# Altium PCB microphone_adapter_1-1.PcbDoc
Units mm, origin at the board's own origin, x right, y up, seen from the top; angles counter-clockwise.
Board outline 60 x 33 mm, 4 copper layers (Top Layer, Inner 1, Inner 2, Bottom Layer), stack 1.53 mm thick; 13 components, 12 nets, 62 pads, 261 vias.
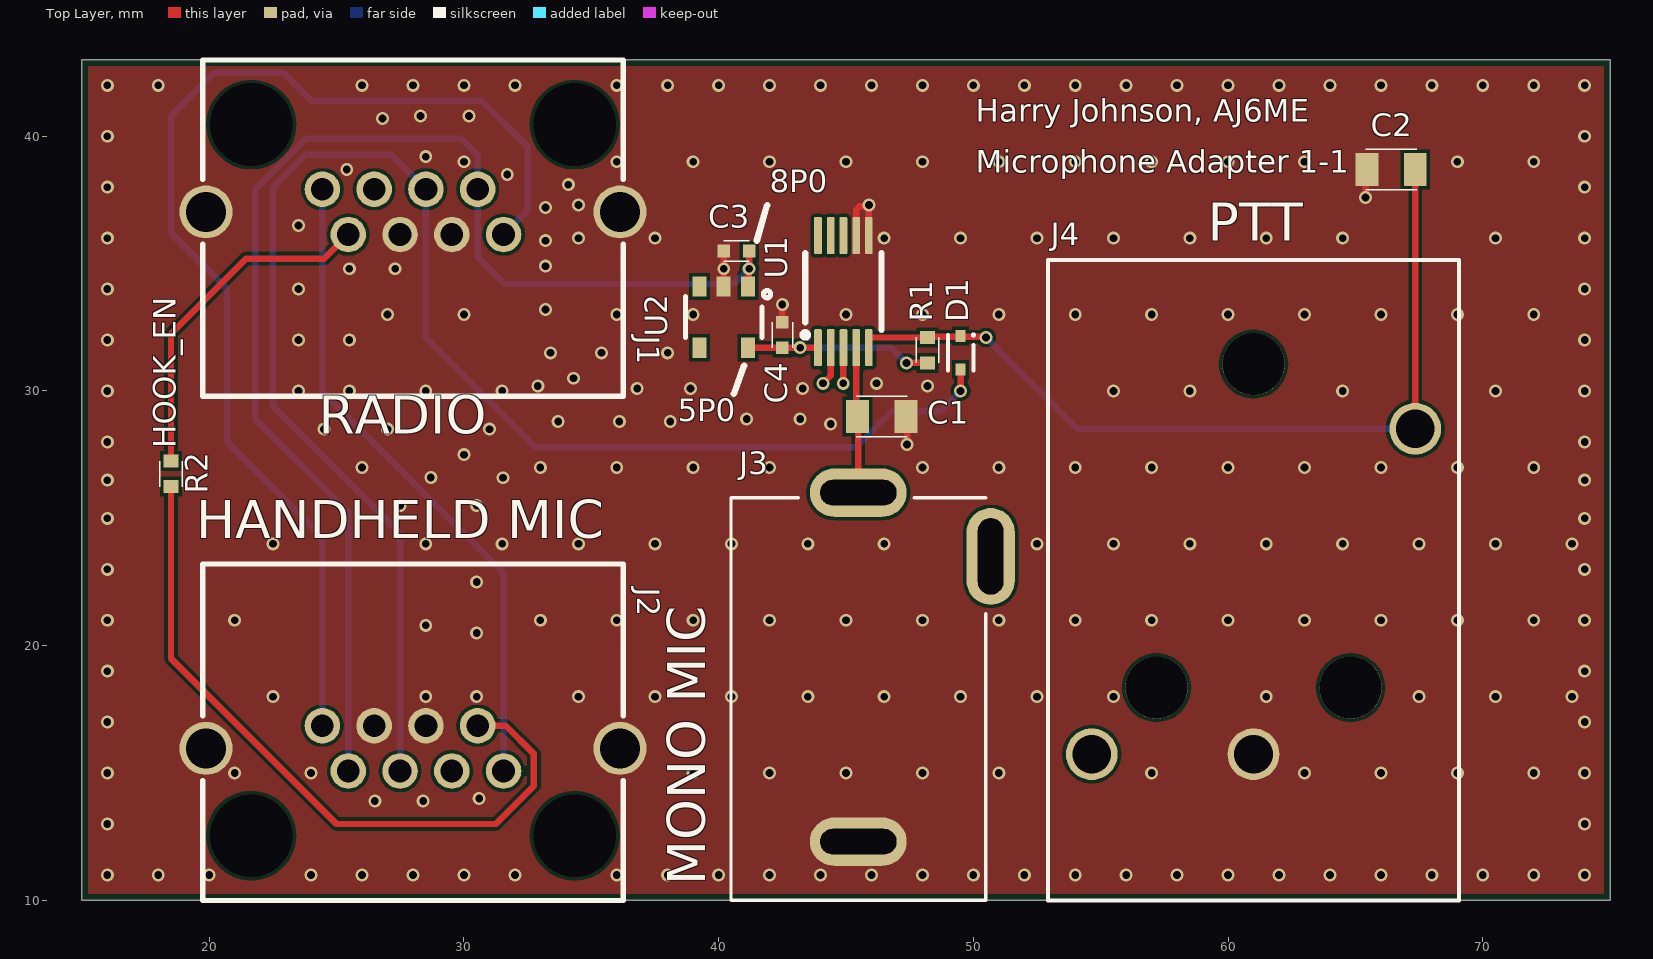
[diagram p0: Top Layer view]
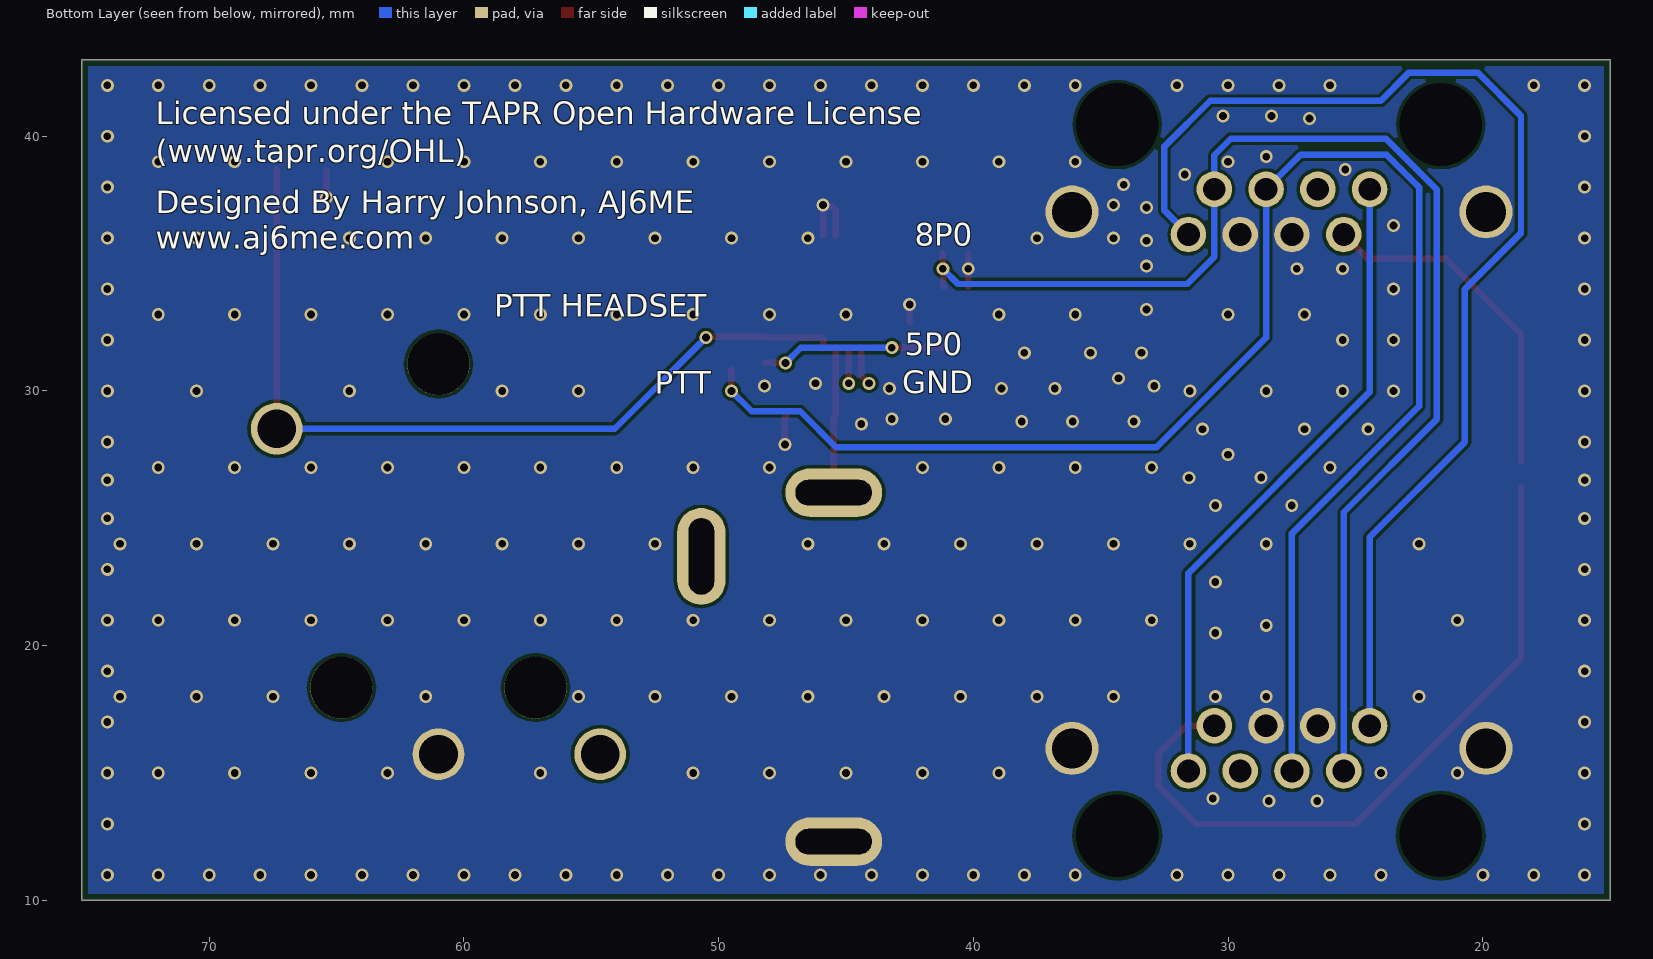
[diagram p1: Bottom Layer view, seen from below]
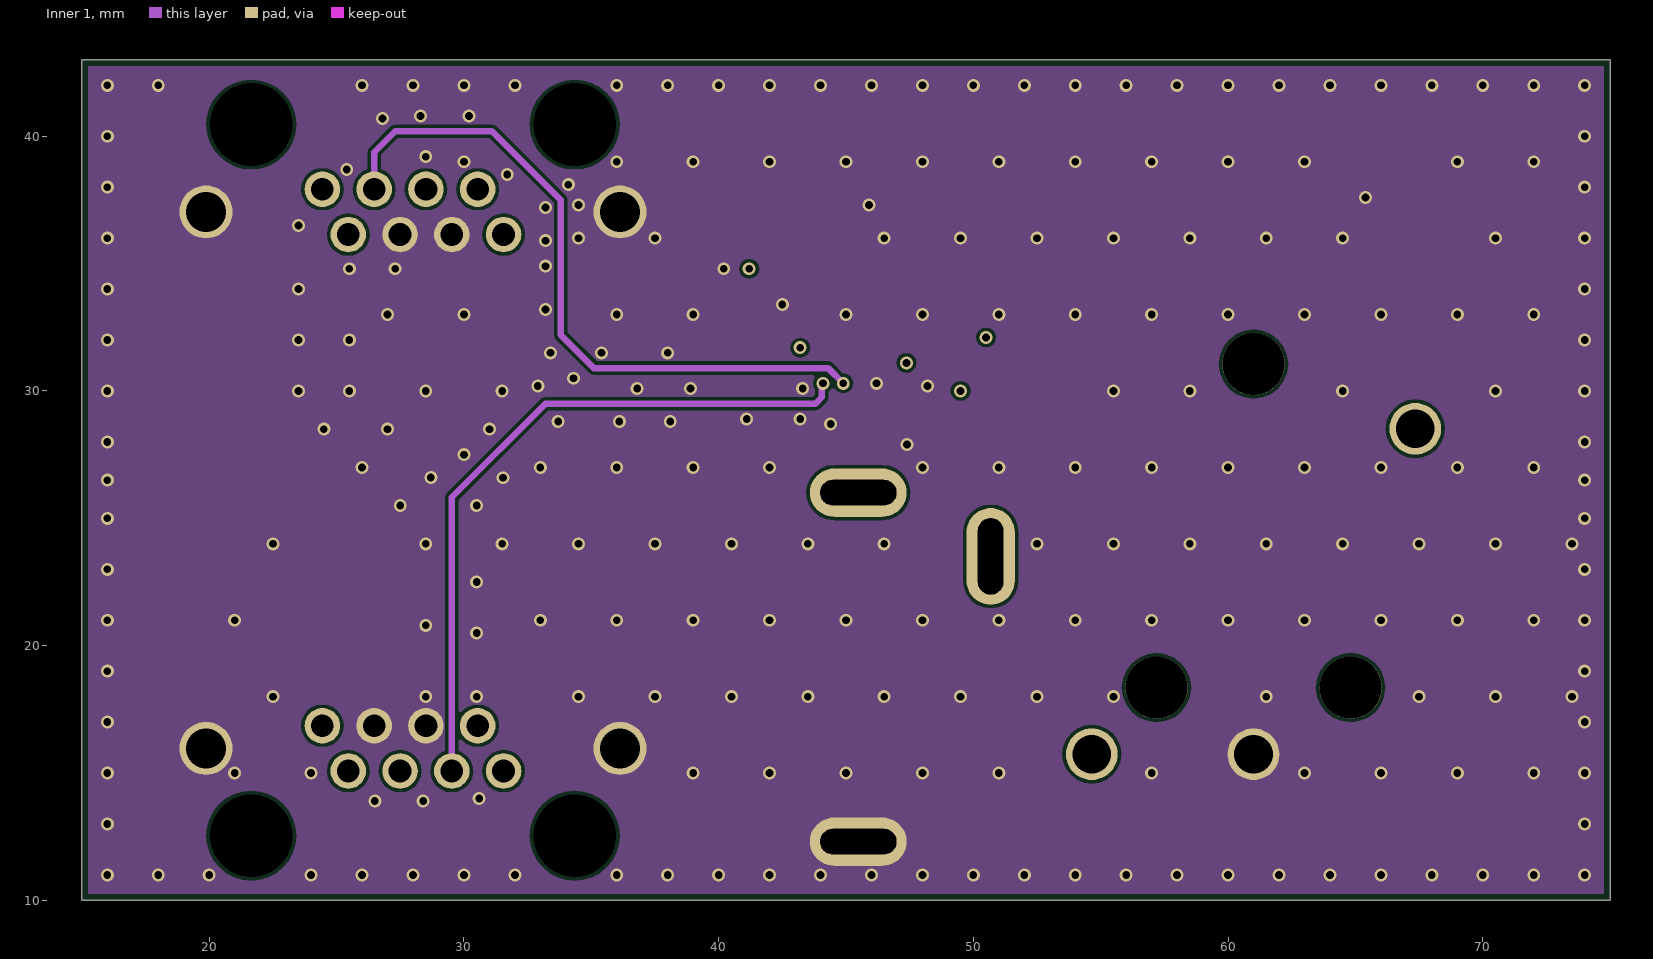
[diagram p2: Inner 1]
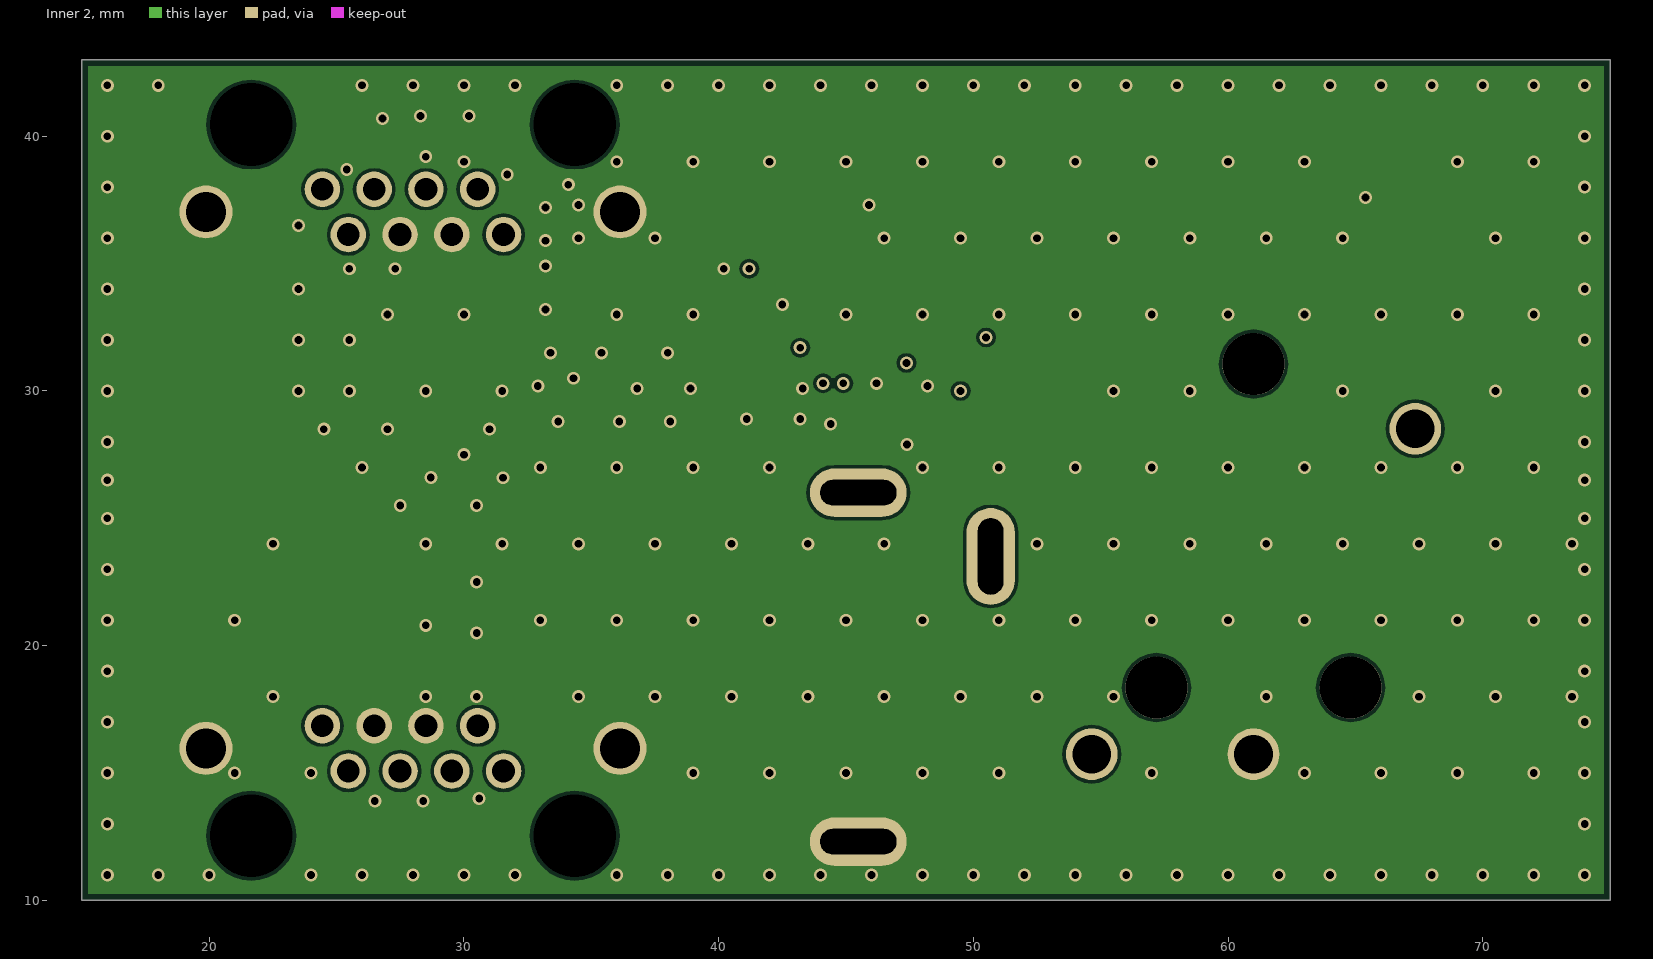
[diagram p3: Inner 2]
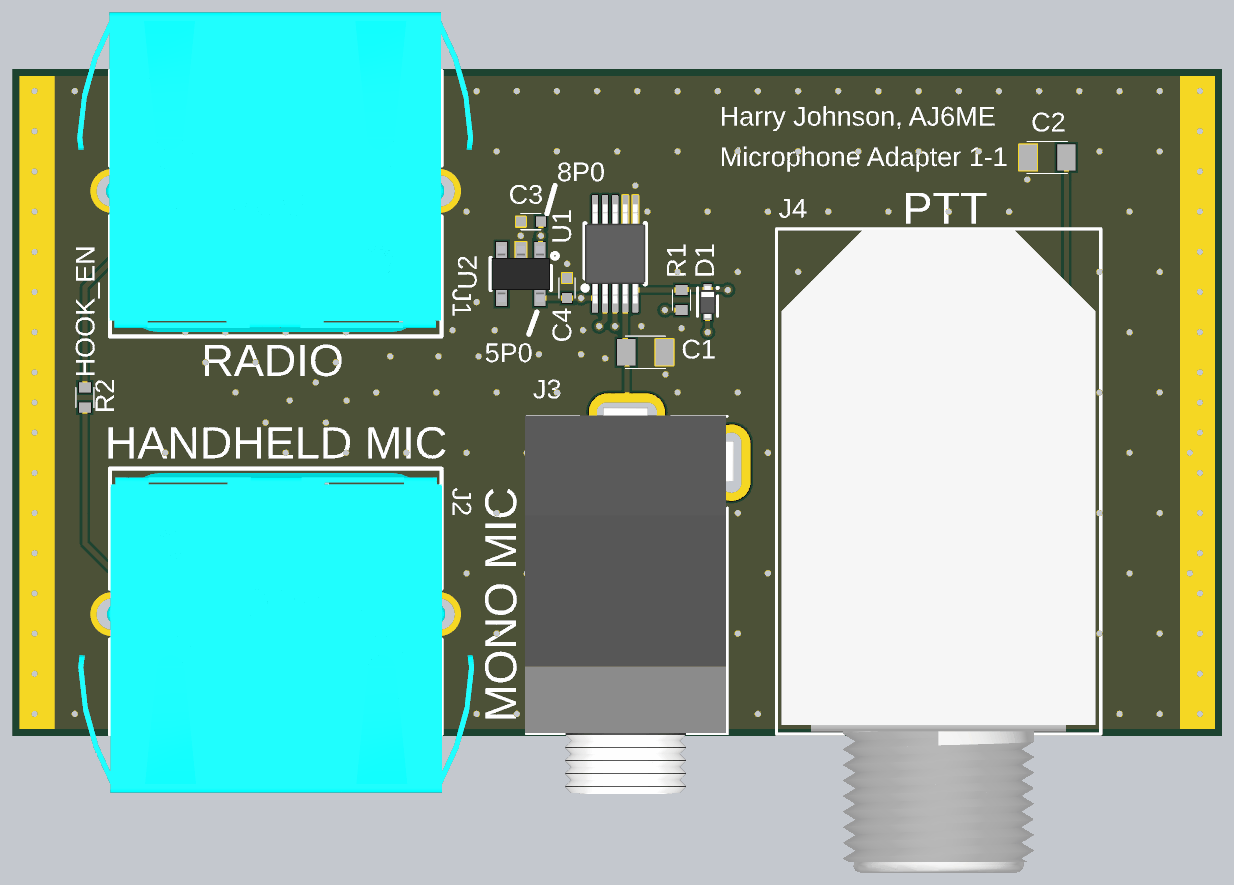
[diagram p4: 3D render of the assembled board from above, using the file's embedded part models]

## Layer stack, top to bottom
Top Solder: solder mask 0.0102, Solder Resist, Dk 3.5
Top Layer: signal copper 0.035
Dielectric 2: prepreg 0.23, PP-006, Dk 4.1
Inner 1: signal copper 0.035
Dielectric 1: core 0.93, MF-Core, Dk 3.9
Inner 2: signal copper 0.035
Dielectric 3: prepreg 0.23, PP-006, Dk 4.1
Bottom Layer: signal copper 0.035
Bottom Solder: solder mask 0.0102, Solder Resist, Dk 3.5

## Board outline
15,10 75,10 75,43 15,43

## Design rules (kind name [scope] priority, off if disabled: settings)
BoardOutlineClearance [not (OnLayer('Top Overlay') or OnLayer('Bottom Overlay'))] p1: gap=0.254 ignorepadtopadclearanceinfootprint=FALSE
Clearance [All] p1: gap=0.127 ignorepadtopadclearanceinfootprint=FALSE
HoleSize [All] p1: absolutevalues=TRUE maxlimit=6.35 minlimit=0.025 maxpercent=80.000 minpercent=20.000
MinimumAnnularRing [All] p1: minimumring=0.102
MinimumSolderMaskSliver [All] p1: minsoldermaskwidth=0.076
PlaneClearance [All] p1: clearance=0.127
PlaneConnect [All] p1: planeconnectstyle=Direct reliefexpansion=0.508 reliefentries=4 reliefconductorwidth=0.254 reliefairgap=0.254
PolygonConnect [All] p1: connectstyle=Direct reliefconductorwidth=0.254 reliefentries=4 polygonreliefangle="90 Angle" airgapwidth=0.254
RoutingVias [All] p1: holewidth=0.254 width=0.457 viastyle="Through Hole" minholewidth=0.254 minwidth=0.457 maxholewidth=5 maxwidth=6
SilkToSilkClearance [All] p1: silktosilkclearance=0.127
SilkToSolderMaskClearance [IsPad] p1: minsilkscreentomaskgap=0 clearancetoexposedcopper=TRUE
SolderMaskExpansion [All] p1: expansion=0.051 istentingtop=FALSE
Width [All] p1: maxlimit=5.08 minlimit=0.127 preferedwidth=0.254
24 further rules are at their usual default settings.

## Components (designator, comment, footprint, x,y, rotation, side; value= is the part's Value field where it differs from the comment)
C1 "GRM21A5C2D470JW01D" C0805_1.30MM 46.4,29 r180 top
C2 "GRM21A5C2D470JW01D" C0805_1.30MM 66.4,38.7 r180 top
C3 "GRM155C81E105ME11D" C0402_0.55MM 40.7,35.5 r180 top
C4 "GRM155C81E105ME11D" C0402_0.55MM 42.5,32.2 r90 top
D1 "BAT54XV2T1G" SOD523_ONSEMI 49.5,31.5 r270 top
J1 "RJHSE-5480" ETH_RJ45_RA_RJHSE-5480 28,43 r180 top
J2 "RJHSE-5480" ETH_RJ45_RA_RJHSE-5480 28,10 r0 top
J3 "MJ-3536" AUD_CUI_MJ-3536 45.482,17.907 r90 top
J4 "RN112BPC" AUD_SWITCHCRAFT_RN112BPC 61,10 r180 top
R1 "RC0402FR-074K7L" R0402_0.40MM 48.2,31.6 r90 top value=4.7k
R2 "RC0402JR-070RL" R0402_0.40MM 18.5,26.75 r90 top value=0
U1 "TS5A22364DGSR" TI_VSSOP_10_DGS0010A 44.9,33.9 r90 top
U2 "AP7370-50W5-7" DIODES_INC_SOT25_5 40.2,32.9 r0 top

## Footprints (in the part's own frame and the unit in brackets; to place one, negate y for a bottom-side part, rotate by r counter-clockwise, add the part's x,y. Pads: shape width x height; smd on the part's side, far side on the other; paste and mask are expansions set on the pad)
AUD_CUI_MJ-3536 [mm] "CUI 3.5mm mono right-angle jack"
  oval 1.9x3.8 hole 1 slot 3 at 90 deg: 1(-5.6,0) 2(8.1,0)
  oval 3.8x1.9 hole 1 slot 3 at 0 deg: 3(5.6,-5.2)
  silkscreen extent -7.9,-5 7.9,5, body extent -10.89,-5.33 8.35,5.07, height 10.29
AUD_SWITCHCRAFT_RN112BPC [mil] "Switchraft RN112BPC"
  round 80 hole 60: 1(0,-226) 3(-250,-729) 5(250,-226)
  round 96 hole 96: 6(-150,-329) 7(150,-329) 8(0,-829)
  silkscreen extent -318,-990 318,0, body extent -307,-989 308,271, height 688
C0402_0.55MM [mm]
  rect 0.5x0.5 smd: 1(-0.5,0) 2(0.5,0)
  silkscreen extent -0.5,-0.4 0.5,0.4, body extent -0.5,-0.25 0.5,0.25, height 0.55
C0805_1.30MM [mm]
  rect 0.9x1.3 smd: 1(-0.95,0) 2(0.95,0)
  silkscreen extent -1,-0.8 1,0.8, body extent -1,-0.63 1,0.63, height 1.3
DIODES_INC_SOT25_5 [mm] "Diodes Inc SOT25 package."
  rect 0.55x0.8 smd: 1(0.95,1.2) 2(0,1.2) 3(-0.95,1.2) 4(-0.95,-1.2) 5(0.95,-1.2)
  silkscreen extent -1.5,-0.8 1.84,1.04, body extent -1.45,-1.4 1.45,1.4, height 1.2
ETH_RJ45_RA_RJHSE-5480 [mil] "Amphenol ICC RJHSE-5480 right-angle RJ45, shielded, no LEDs."
  round 55 hole 35: 1(140,200) 2(100,270) 3(60,200) 4(20,270) 5(-20,200) 6(-60,270) 7(-100,200) 8(-140,270)
  oval 0x127.99 hole 128 paste-393.7 mask-393.7: MH(-250,100) MH(250,100)
  round 82 hole 62: SHLD(-320,235) SHLD(320,235)
  silkscreen extent -325,0 325,520, body extent -387,-115 389,511, height 596
R0402_0.40MM [mm]
  rect 0.5x0.6 smd: 1(-0.5,0) 2(0.5,0)
  silkscreen extent -0.5,-0.45 0.5,0.45, body extent -0.5,-0.25 0.5,0.25, height 0.4
SOD523_ONSEMI [mm] "On Semi SOD523 Diode"
  rect 0.48x0.4 smd: 1(-0.66,0) 2(0.66,0)
  silkscreen extent -0.75,-0.5 0.7,0.55, body extent -0.8,-0.4 0.8,0.4, height 0.7
TI_VSSOP_10_DGS0010A [mm] "TI 10-pin VSSOP"
  rrect25% 1.45x0.3 smd mask+0.05: 1(-2.2,1) 2(-2.2,0.5) 3(-2.2,0) 4(-2.2,-0.5) 5(-2.2,-1) 6(2.2,-1) 7(2.2,-0.5) 8(2.2,0) 9(2.2,0.5) 10(2.2,1)
  silkscreen extent -1.8,-1.49 1.51,1.6, body extent -2.46,-1.5 2.46,1.5, height 1.06

## Part data
C1 C2: library part capacitor_standard_864, "CAP CER 47PF 200V C0G/NP0 0805", Capacitance=47pF, Digi-Key Part Number=490-14653-1-ND, Manufacturer="Murata Electronics", Operating Temperature="-55°C ~ 125°C", Package / Case="0805 (2012 Metric)", Temperature Coefficient="C0G, NP0", Tolerance=±5%, Voltage - Rated=200V, Applications="General Purpose", ComponentLink1Description=Datasheet, ComponentLink1URL=https://search.murata.co.jp/Ceramy/image/img/A01X/G101/ENG/GRM21A5C2D470JW01-01.pdf, Key=capacitor_standard_864, Manufacturer Part Number=GRM21A5C2D470JW01D, Mounting Type="Surface Mount, MLCC", Part Status=Active, Series=GRM, Size / Dimension="0.079\" L x 0.049\" W (2.00mm x 1.25mm)", Thickness (Max)="0.051\" (1.30mm)", Unit Price (USD)=0.31
C3 C4: library part capacitor_standard_537, "CAP CER 1UF 25V X6S 0402", Capacitance=1µF, Digi-Key Part Number=490-10015-1-ND, Manufacturer="Murata Electronics", Operating Temperature="-55°C ~ 105°C", Package / Case="0402 (1005 Metric)", Temperature Coefficient=X6S, Tolerance=±20%, Voltage - Rated=25V, Applications="General Purpose", ComponentLink1Description=Datasheet, ComponentLink1URL=https://search.murata.co.jp/Ceramy/image/img/A01X/G101/ENG/GRM155C81E105ME11-01.pdf, Key=capacitor_standard_537, Manufacturer Part Number=GRM155C81E105ME11D, Mounting Type="Surface Mount, MLCC", Part Status=Active, Series=GRM, Size / Dimension="0.039\" L x 0.020\" W (1.00mm x 0.50mm)", Thickness (Max)="0.022\" (0.55mm)", Unit Price (USD)=0.26
D1: library part DIODE_SCHOTTKY_30V_100MA_BAT54XV2T1G, "ON Semi BAT54XV2T1G; SMT Schottky Diode; 30V 200mA; 5ns; 2-Pin SOD-523", Average Rectified Current=200mA, Capacitance=10pF, Case/Package=SOD-523-2, Forward Voltage=800mV, Manufacturer="ON Semiconductor", Max Forward Surge Current (Ifsm)=600mA, Max Operating Temperature=125°C, Max Repetitive Reverse Voltage (Vrrm)=30V, Max Reverse Leakage Current=2uA, Min Operating Temperature=-55°C, Package Quantity=3000, Power Dissipation=200mW, Supplier Part Number 1=BAT54XV2T1GOSCT-ND, Category="Rectifier Diodes", ComponentLink1Description=https://datasheet.ciiva.com/16978/0900766b80dac45a-16978093.pdf?src-supplier=Allied+Electronics, ComponentLink1URL=https://datasheet.ciiva.com/16978/0900766b80dac45a-16978093.pdf?src-supplier=Allied+Electronics, ComponentLink2Description=https://datasheet.ciiva.com/25954/bat54xv2t1-d-25954496.pdf?src-supplier=Avnet+Europe, ComponentLink2URL=https://datasheet.ciiva.com/25954/bat54xv2t1-d-25954496.pdf?src-supplier=Avnet+Europe, ComponentLink3Description=https://datasheet.ciiva.com/915/bat54xv2t1-d-915462.pdf?src-supplier=Digi-Key, ComponentLink3URL=https://datasheet.ciiva.com/915/bat54xv2t1-d-915462.pdf?src-supplier=Digi-Key, ComponentLink4Description=https://datasheet.ciiva.com/8299/bat54xv2t1-d-8299994.pdf?src-supplier=Avnet, ComponentLink4URL=https://datasheet.ciiva.com/8299/bat54xv2t1-d-8299994.pdf?src-supplier=Avnet, ComponentLink5Description=https://datasheet.ciiva.com/16475/bat54xv2t1-d-16475627.pdf?src-supplier=Avnet+Asia, ComponentLink5URL=https://datasheet.ciiva.com/16475/bat54xv2t1-d-16475627.pdf?src-supplier=Avnet+Asia, ComponentLink6Description=https://datasheet.ciiva.com/8299/bat54xv2t1-d-8299996.pdf?src-supplier=Avnet, ComponentLink6URL=https://datasheet.ciiva.com/8299/bat54xv2t1-d-8299996.pdf?src-supplier=Avnet, ComponentLink7Description=https://datasheet.ciiva.com/22659/1708236-22659020.pdf?src-supplier=Element14, ComponentLink7URL=https://datasheet.ciiva.com/22659/1708236-22659020.pdf?src-supplier=Element14, ComponentLink8Description=https://datasheet.ciiva.com/915/bat54xv2t1-d-915463.pdf?src-supplier=Digi-Key, ComponentLink8URL=https://datasheet.ciiva.com/915/bat54xv2t1-d-915463.pdf?src-supplier=Digi-Key, ComponentLink9Description=https://datasheet.ciiva.com/8053/bat54xv2t1-d-8053674.pdf?src-supplier=Element14, ComponentLink9URL=https://datasheet.ciiva.com/8053/bat54xv2t1-d-8053674.pdf?src-supplier=Element14, ComponentLink10Description=https://datasheet.ciiva.com/16381/bat54xv2t1-d-16381647.pdf?src-supplier=Future+Electronics, ComponentLink10URL=https://datasheet.ciiva.com/16381/bat54xv2t1-d-16381647.pdf?src-supplier=Future+Electronics, Contact Plating=Tin,Matte, Current Rating=200mA, Element Configuration=Single, Forward Current=200mA, Halogen Free="Halogen Free", Height=0.6mm, Lead Free="Lead Free", Length=1.2mm, Manufacturer Part Number=BAT54XV2T1G, Max Reverse Voltage (DC)=30V, Max Surge Current=600mA, Number of Pins=2, Output Current=200mA, Packaging="Tape and Reel", Peak Non-Repetitive Surge Current=600mA, Peak Reverse Current=2uA, Polarity=Standard, Pricing 1="1=0.22000, 10=0.17800, 25=0.14960, 100=0.07300, 250=0.07188, 500=0.06092, 1000=0.04233 (USD)", Radiation Hardening=No, REACH SVHC="No SVHC", Recovery Time=5ns, Reverse Recovery Time=5ns, RoHS=Yes, Stock 1=229062, Supplier 1=Digi-Key, Voltage Rating (DC)=30V, Width=0.8mm
J1 J2: library part CONN_ETH_RJ45_RA_SHLD_RJHSE-5480_ALT, "Conn RJ-45 F 8 POS 2.03mm Solder RA Thru-Hole 8 Terminal 1 Port Tray Cat 5", Color=Black, Contact Resistance=20mR, Current Rating=1.5A, Flammability Rating="UL94 V-0", Insulation Resistance=500MR, Manufacturer=Amphenol, Max Operating Temperature=85°C, Max Voltage Rating (AC)=125V, Min Operating Temperature=-55°C, Package Quantity=120, Supplier Part Number 1=RJHSE-5480-ND, Category="Modular / Ethernet Connectors", ComponentLink1Description=https://datasheet.ciiva.com/685/rjhse548x-685638.pdf?src-supplier=Digi-Key, ComponentLink1URL=https://datasheet.ciiva.com/685/rjhse548x-685638.pdf?src-supplier=Digi-Key, ComponentLink2Description=https://datasheet.ciiva.com/15171/getdatasheetpartid-473858-15171069.pdf?src-supplier=Verical, ComponentLink2URL=https://datasheet.ciiva.com/15171/getdatasheetpartid-473858-15171069.pdf?src-supplier=Verical, ComponentLink3Description=https://datasheet.ciiva.com/3139/rjhse548x-3139205.pdf?src-supplier=Avnet, ComponentLink3URL=https://datasheet.ciiva.com/3139/rjhse548x-3139205.pdf?src-supplier=Avnet, ComponentLink4Description=https://datasheet.ciiva.com/7995/rjhse548x-7995031.pdf?src-supplier=Element14, ComponentLink4URL=https://datasheet.ciiva.com/7995/rjhse548x-7995031.pdf?src-supplier=Element14, ComponentLink5Description=https://datasheet.ciiva.com/16649/rjhse548x-16649863.pdf?src-supplier=Avnet+Europe, ComponentLink5URL=https://datasheet.ciiva.com/16649/rjhse548x-16649863.pdf?src-supplier=Avnet+Europe, Connector Type=Jack,RJ45, Contact Material=Bronze, Contact Plating=Gold, Depth=15.75mm, Direction=Up, Gender=Female, Housing Material=Thermoplastic, Lead Free="Lead Free", Length=16.51mm, Manufacturer Part Number=RJHSE-5480, Max Current Rating=1.5A, Mount="Through Hole", Number of Contacts=8, Number of Ports=1, Number of Positions=8, Number of Positions Loaded=8, Number of Rows=1, Orientation="Right Angle", Packaging=Tray, Pitch=2.03mm, Pricing 1="1=1.28000, 10=1.12500, 25=1.05840, 50=1.01440, 100=0.97020, 250=0.88200, 500=0.79380, 1000=0.70560, 2500=0.63945 (USD)", Radiation Hardening=No, REACH SVHC=Unknown, RoHS=Yes, Shielding=Shielded, Stock 1=1529, Supplier 1=Digi-Key, Termination=Solder, Voltage Rating=125V
J3: library part CONN_AUD_3.5_MM_MONO_MJ-3536, "CONN JACK MONO 3.5MM R/A", Color=Black, Current Rating=1A, Manufacturer=CUI, Supplier Part Number 1=CP-3536-ND, Body Material=Brass, Category="Audio / Video Cables", ComponentLink1Description=http://www.cui.com/product/resource/digikeypdf/mj-3536.pdf?src-supplier=Digi-Key, ComponentLink1URL=http://www.cui.com/product/resource/digikeypdf/mj-3536.pdf?src-supplier=Digi-Key, Connector Type=Jack, Contact Plating=Tin, Diameter=3.5mm, Gender=Female, Lead Free="Lead Free", Manufacturer Part Number=MJ-3536, Mount="Through Hole,Panel", Number of Conductors=2, Number of Ports=1, Orientation=Horizontal, Packaging=Bulk, Pricing 1="1=1.24000, 10=1.09400, 25=1.02960, 50=0.98680, 100=0.94380, 250=0.85800, 500=0.77220, 1000=0.68640, 2500=0.62205 (USD)", RoHS=Yes, Shielding=Unshielded, Stock 1=3239, Supplier 1=Digi-Key, Termination=Solder
J4: library part CONN_AUD_250_MIL_RN112BPC, "CONN JACK STEREO 0.25\" (6.35MM) R/A", Color=Black, Manufacturer=Switchcraft, Package Quantity=100, Supplier Part Number 1=SC1123-ND, Body Material=Plastic, Category=Connectors, ComponentLink1Description=https://datasheet.ciiva.com/15181/getdatasheetpartid-111564-15181163.pdf?src-supplier=Verical, ComponentLink1URL=https://datasheet.ciiva.com/15181/getdatasheetpartid-111564-15181163.pdf?src-supplier=Verical, ComponentLink2Description=https://datasheet.ciiva.com/19462/1774930-19462671.pdf?src-supplier=Jameco, ComponentLink2URL=https://datasheet.ciiva.com/19462/1774930-19462671.pdf?src-supplier=Jameco, Contact Material="Copper Alloy", Contact Plating=Silver, Depth=32.51mm, Diameter=6.35mm, Gender=Female, Height=17.17mm, Housing Color=Black, Housing Material=Thermoplastic, Lead Free="Lead Free", Length=15.87mm, Manufacturer Part Number=RN112BPC, Mount="Through Hole,PCB", Number of Contacts=3, Number of Ports=1, Number of Positions=3, Number of Terminals=5, Orientation="Right Angle", Packaging=Bulk, Pitch=7.62mm, Pricing 1="1=2.80000, 10=2.68800, 25=2.46400, 50=2.35200, 100=2.24000, 250=1.96000, 500=1.90400, 1000=1.75000 (USD)", REACH SVHC=Unknown, RoHS=Yes, Shielding=Unshielded, Stock 1=3348, Supplier 1=Digi-Key, Termination=Solder
R1: library part resistor_standard_915, "RES SMD 4.7K OHM 1% 1/16W 0402", Digi-Key Part Number=311-4.7KLRCT-ND, Manufacturer=Yageo, Operating Temperature="-55°C ~ 155°C", Package / Case="0402 (1005 Metric)", Power (Watts)="0.063W, 1/16W", Resistance=4.7k, Supplier Device Package=402, Temperature Coefficient=±100ppm/°C, Tolerance=±1%, ComponentLink1Description="Series Datasheet", ComponentLink1URL=https://www.yageo.com/upload/media/product/productsearch/datasheet/rchip/PYu-RC_Group_51_RoHS_L_10.pdf, Composition="Thick Film", Features="Moisture Resistant", Height - Seated (Max)="0.016\" (0.40mm)", Key=resistor_standard_915, Manufacturer Part Number=RC0402FR-074K7L, Series=RC, Size / Dimension="0.039\" L x 0.020\" W (1.00mm x 0.50mm)", Unit Price (USD)=0.1
R2: library part resistor_standard_0, "RES SMD 0 OHM JUMPER 1/16W 0402", Digi-Key Part Number=311-0.0JRCT-ND, Manufacturer=Yageo, Operating Temperature="-55°C ~ 155°C", Package / Case="0402 (1005 Metric)", Power (Watts)="0.063W, 1/16W", Resistance=0, Supplier Device Package=402, Temperature Coefficient=-, Tolerance=Jumper, ComponentLink1Description="Series Datasheet", ComponentLink1URL=https://www.yageo.com/upload/media/product/productsearch/datasheet/rchip/PYu-RC_Group_51_RoHS_L_10.pdf, Composition="Thick Film", Features="Moisture Resistant", Height - Seated (Max)="0.016\" (0.40mm)", Key=resistor_standard_0, Manufacturer Part Number=RC0402JR-070RL, Series=RC, Size / Dimension="0.039\" L x 0.020\" W (1.00mm x 0.50mm)", Unit Price (USD)=0.1
U1: library part IC_ANALOG_SWITCH_DUAL_SPDT_TS5A22364DGSR, "TEXAS INSTRUMENTS         TS5A22364DGSR.             ANALOG SWITCH, DUAL, SPDT, MSOP-10", Case/Package=VSSOP, High Level Output Current=150mA, Manufacturer="Texas Instruments", Max Operating Temperature=85°C, Max Supply Current=3.3uA, Max Supply Voltage=5.5V, Min Operating Temperature=-40°C, Min Supply Voltage=2.3V, Nominal Supply Current=200nA, On-State Resistance=650mR, Package Quantity=2500, Supplier Part Number 1=296-23622-1-ND, Category="Decoders and Multiplexers", ComponentLink1Description=https://datasheet.ciiva.com/1671/ts5a22362-1671776.pdf?src-supplier=Digi-Key, ComponentLink1URL=https://datasheet.ciiva.com/1671/ts5a22362-1671776.pdf?src-supplier=Digi-Key, ComponentLink2Description=https://datasheet.ciiva.com/4917/scds261d-126658-4917905.pdf?src-supplier=Mouser, ComponentLink2URL=https://datasheet.ciiva.com/4917/scds261d-126658-4917905.pdf?src-supplier=Mouser, ComponentLink3Description=https://datasheet.ciiva.com/15126/getdatasheetpartid-48044-15126908.pdf?src-supplier=Verical, ComponentLink3URL=https://datasheet.ciiva.com/15126/getdatasheetpartid-48044-15126908.pdf?src-supplier=Verical, ComponentLink4Description=https://datasheet.ciiva.com/8064/1831235-8064894.pdf?src-supplier=Element14, ComponentLink4URL=https://datasheet.ciiva.com/8064/1831235-8064894.pdf?src-supplier=Element14, ComponentLink5Description=https://datasheet.ciiva.com/1671/ts5a22362-1671777.pdf?src-supplier=Digi-Key, ComponentLink5URL=https://datasheet.ciiva.com/1671/ts5a22362-1671777.pdf?src-supplier=Digi-Key, ComponentLink6Description=https://datasheet.ciiva.com/1671/ts5a22362-1671778.pdf?src-supplier=Digi-Key, ComponentLink6URL=https://datasheet.ciiva.com/1671/ts5a22362-1671778.pdf?src-supplier=Digi-Key, ComponentLink7Description=https://datasheet.ciiva.com/14435/ts5a22362-14435371.pdf?src-supplier=Avnet, ComponentLink7URL=https://datasheet.ciiva.com/14435/ts5a22362-14435371.pdf?src-supplier=Avnet, Contact Plating=Gold, Height=0.95mm, Lead Free="Lead Free", Length=3.1mm, Low Level Output Current=150mA, Manufacturer Part Number=TS5A22364DGSR, Mount="Surface Mount", Number of Channels=2, Number of Inputs=2, Number of Outputs=4, Number of Pins=10, Operating Supply Current=200nA, Packaging="Tape and Reel", Polarity=Non-Inverting, Pricing 1="1=1.02000, 10=0.91500, 25=0.86800, 100=0.66650, 250=0.58900, 500=0.55800, 1000=0.43400 (USD)", Radiation Hardening=No, REACH SVHC="No SVHC", RoHS=Yes, Stock 1=3273, Supplier 1=Digi-Key, Supply Type=Single, Throw Configuration=SPDT, Turn-Off Delay Time=70ns, Turn-On Delay Time=80ns, Weight=0.000663oz, Width=3.1mm
U2: library part LDO_5V_AP7370-50W5-7, "LDO Regulator Pos 5V 0.3A 5-Pin SOT-25 T/R", Manufacturer=Diodes, Supplier Part Number 1=AP7370-50W5-7DICT-ND, Manufacturer Part Number=AP7370-50W5-7, Pricing 1="1=0.38000, 10=0.30600, 25=0.27960, 100=0.18860, 250=0.15608, 500=0.14308, 1000=0.10732 (USD)", RoHS=No, Stock 1=861, Supplier 1=Digi-Key

## Via types
v1: diameter 0.508, hole 0.305, Top Layer to Bottom Layer, tented both sides, 222 vias
v2: diameter 0.508, hole 0.305, Top Layer to Bottom Layer, 35 vias
v3: diameter 0.508, hole 0.305, Top Layer to Bottom Layer, tented top, 4 vias

## Nets (pads, with @x,y where several pads share a name; then routed paths per layer and width w, separated by ;. In a path a pad name is that pad's centre, name@x,y a point inside that pad or via, vN(x,y) a via of type N, cw(c..) or ccw(c..) an arc to the next point about the centre after c; other vN are vias at no path point)
5P0: C4.1 R1.1 U1.1 U2.5 | length 8
  Top Layer w0.254: U2.5 C4.1 v3(43.2,31.7) U1.1 ; v1(47.372,31.102) 48.198,31.102 R1.1
  Bottom Layer w0.254: v3(43.2,31.7) 46.775,31.7 v1(47.372,31.102)
8P0: C3.1 J1.7 J2.7 U2.1 | length 50.8
  Top Layer w0.254: U2.1 41.175,34.125 41.175,34.775 v3(41.2,34.8) C3.1@41.2,35.4
  Bottom Layer w0.254: J2.7 25.46,25.24 21.8,28.9 21.8,37.9 23.8,39.9 29.9,39.9 30.54,39.26 J1.7 30.54,35.26 31.6,34.2 40.6,34.2 v3(41.2,34.8)
GND: C1.1 C2.2 C3.2 C4.2 J1.4 J1.6 J1.SHLD J2.4 J2.6 J2.SHLD J3.1 J4.1 U1.6 U1.7 U2.2 | length 7
  Top Layer w0.254: U2.2 v1(40.2,34.8) C3.2@40.2,35.4 ; C4.2 v1(42.5,33.4) ; U1.7 45.4,37.112 45.549,37.261 45.861,37.261 v1(45.9,37.3) U1.6 ; C1.1 47.4,28.95 v1(47.4,27.9) ; v1(65.4,37.6) C2.2@65.4,38.65
  other v1: 18,11 20,11 24,11 26,11 28,11 30,11 32,11 36,11 38,11 40,11 42,11 44,11 46,11 48,11 50,11 52,11 54,11 56,11 58,11 60,11 62,11 64,11 66,11 68,11 70,11 72,11 26.5,13.9 28.4,13.9 30.6,14 21,15 24,15 39,15 42,15 45,15 48,15 51,15 57,15 63,15 66,15 69,15 72,15 22.5,18 28.5,18 30.5,18 34.5,18 37.5,18 40.5,18 43.5,18 46.5,18 49.5,18 52.5,18 55.5,18 61.5,18 67.5,18 70.5,18 73.5,18 30.5,20.5 28.5,20.8 21,21 33,21 36,21 39,21 42,21 45,21 48,21 51,21 54,21 57,21 60,21 63,21 66,21 69,21 72,21 30.5,22.5 22.5,24 28.5,24 31.5,24 34.5,24 37.5,24 40.5,24 43.5,24 46.5,24 52.5,24 55.5,24 58.5,24 61.5,24 64.5,24 67.5,24 70.5,24 73.5,24 27.5,25.5 30.5,25.5 28.7,26.6 31.529,26.595 26,27 33,27 36,27 39,27 42,27 48,27 51,27 54,27 57,27 60,27 63,27 66,27 69,27 72,27 30,27.5 24.5,28.5 27,28.5 31,28.5 44.4,28.7 33.7,28.8 36.1,28.8 38.1,28.8 41.1,28.9 43.2,28.9 23.5,30 25.5,30 28.5,30 31.5,30 55.5,30 58.5,30 64.5,30 70.5,30 36.8,30.1 38.9,30.1 32.9,30.2 48.2,30.2 46.2,30.3 34.3,30.5 33.4,31.5 35.4,31.5 38,31.5 23.5,32 25.5,32 27,33 30,33 36,33 39,33 45,33 48,33 51,33 54,33 57,33 60,33 63,33 66,33 69,33 72,33 33.2,33.2 23.5,34 25.5,34.8 27.3,34.8 33.2,34.9 33.2,35.9 34.5,36 37.5,36 46.5,36 49.5,36 52.5,36 55.5,36 58.5,36 61.5,36 64.5,36 70.5,36 23.5,36.5 33.2,37.2 34.5,37.3 34.1,38.1 31.7,38.5 25.4,38.7 30,39 36,39 39,39 42,39 45,39 48,39 51,39 54,39 57,39 60,39 63,39 69,39 72,39 28.5,39.2 26.8,40.7 28.3,40.8 30.2,40.8 18,42 26,42 28,42 30,42 32,42 36,42 38,42 40,42 42,42 44,42 46,42 48,42 50,42 52,42 54,42 56,42 58,42 60,42 62,42 64,42 66,42 68,42 70,42 72,42
  other v2: 16,11 74,11 16,13 74,13 16,15 74,15 16,17 74,17 16,19 74,19 16,21 74,21 16,23 74,23 16,25 74,25 16,26.5 74,26.5 16,28 74,28 16,30 74,30 16,32 74,32 16,34 74,34 16,36 74,36 16,38 74,38 16,40 74,40 16,42 74,42
  other v3: 43.3,30.1
HOOK_HANDHELD: J2.2 R2.1 | length 28.2
  Top Layer w0.254: R2.1 18.5,19.5 25,13 31.25,13 32.75,14.5 32.75,15.75 31.642,16.858 J2.2
HOOK_RADIO: J1.2 R2.2 | length 13.6
  Top Layer w0.254: R2.2 18.5,32.25 21.45,35.2 24.518,35.2 J1.2
KEYPAD: J1.1 J2.1 | length 25.8
  Bottom Layer w0.254: J1.1 24.444,29.956 31.556,22.844 J2.1
MIC_HANDHELD: J2.3 U1.2 | length 29
  Top Layer w0.254: v1(44.1,30.3) 44.4,30.6 U1.2
  Inner 1 w0.254: J2.3 29.524,25.824 33.2,29.5 43.8,29.5 44.051,29.751 44.051,30.251 v1(44.1,30.3) v1@44.045,30.3
MIC_HEADSET: C1.2 J3.2 U1.4 | length 6.7
  Top Layer w0.254: U1.4 45.4,29.05 C1.2 45.482,28.968 J3.2 J3.2@46.432,26.007
MIC_OUT: J1.3 U1.3 | length 28.8
  Top Layer w0.254: v1(44.892,30.3) 44.896,30.304 44.896,31.696 U1.3
  Inner 1 w0.254: J1.3 26.476,39.376 27.3,40.2 31.1,40.2 33.8,37.5 33.8,32.2 35.1,30.9 44.292,30.9 v1(44.892,30.3)
PTT: D1.2 J1.5 J2.5 | length 62.4
  Top Layer w0.254: v2(49.5,30) D1.2
  Bottom Layer w0.254: J2.5 27.492,24.408 22.5,29.4 22.5,38 23.776,39.276 27.152,39.276 J1.5 28.508,32.092 32.8,27.8 45.4,27.8 46.8,29.2 48.7,29.2 v2(49.5,30)
PTT_HEADSET: C2.1 D1.1 J4.3 R1.2 U1.5 | length 33.6
  Top Layer w0.254: U1.5@45.923,31.677 U1.5 45.9,32.077 45.923,32.1 R1.2 48.23,32.13 49.47,32.13 D1.1 49.53,32.13 50.47,32.13 v3(50.5,32.1) ; J4.3 C2.1
  Bottom Layer w0.254: v3(50.5,32.1) 54.083,28.517 J4.3
RJ45_P8: J1.8 J2.8 | length 46.2
  Bottom Layer w0.254: J2.8 24.444,24.256 20.7,28 20.7,34 18.5,36.2 18.5,40.8 20.2,42.5 22.9,42.5 24,41.4 30.7,41.4 32.5,39.6 32.5,37.086 J1.8
pads on no net: J1.MH J2.MH J3.3 J4.5 J4.6 J4.7 J4.8 U1.8 U1.9 U1.10 U2.3 U2.4

## Polygon pours and split planes (outlines as drawn)
GND on Bottom Layer "GND_L04_P005" (solid, pour order 5): 15,43 75,43 75,10 15,10
GND on Bottom Layer "GND_L04_P006" (solid, pour order 6): 75,10 73,10 73,43 75,43
no net on Top Solder "GND_L01_P003" (solid): 75,10 73,10 73,43 75,43
no net on Top Solder "GND_L01_P003" (solid): 15,43 17,43 17,10 15,10
no net on Bottom Solder "GND_L01_P003" (solid): 75,10 73,10 73,43 75,43
no net on Bottom Solder "GND_L01_P003" (solid): 15,43 17,43 17,10 15,10
GND on Inner 1 "GND_L02_P002" (solid, remove dead copper, pour order 2): 15,43 15,10 75,10 75,43
GND on Inner 2 "GND_L03_P001" (solid, remove dead copper, pour order 1): 10.2,42.8 10.2,10.2 79.8,10.2 79.8,42.8
GND on Top Layer "GND_L01_P007" (solid, pour order 7): 15,43 75,43 75,10 15,10

## Silkscreen, mask and mechanical layers (free items; w line width, h text height)
Top Overlay:
  lines w0.254: 40.6,29.9 41,31 ; 41.5,35.9 41.9,37.3
  text "Harry Johnson, AJ6ME" at 50.1,40.286 h1.52
  text "Microphone Adapter 1-1" at 50.1,38.27 h1.52
  text "8P0" at 42,37.516 h1.52
  text "PTT" at 59.2,35.4 h2.54
  text "5P0" at 38.4,28.516 h1.52
  text "RADIO" at 24.3,27.827 h2.54
  text "HOOK_EN" at 18.98,27.75 h1.52 r90
  text "HANDHELD MIC" at 19.5,23.727 h2.54
  text "MONO MIC" at 39.973,10.6 h2.54 r90
Bottom Overlay:
  text "Licensed under the TAPR Open Hardware License" at 72.1,40.17 h1.52
  text "(www.tapr.org/OHL)" at 72.1,38.686 h1.52
  text "Designed By Harry Johnson, AJ6ME" at 72.1,36.686 h1.52
  text "8P0" at 42.3,35.416 h1.52
  text "www.aj6me.com" at 72.1,35.286 h1.52
  text "PTT HEADSET" at 58.8,32.616 h1.52
  text "5P0" at 42.7,31.116 h1.52
  text "GND" at 42.8,29.616 h1.52
  text "PTT" at 52.5,29.6 h1.52
Board Outline:
  the board outline again, w0.203

## Text inside footprints (layer, text, board x,y; h text height)
J4: Mechanical 15 "Board Edge Here" at 64,10.809 h1.02 r180